# EAGLE board Final_PCB (EAGLE 9.7.0)
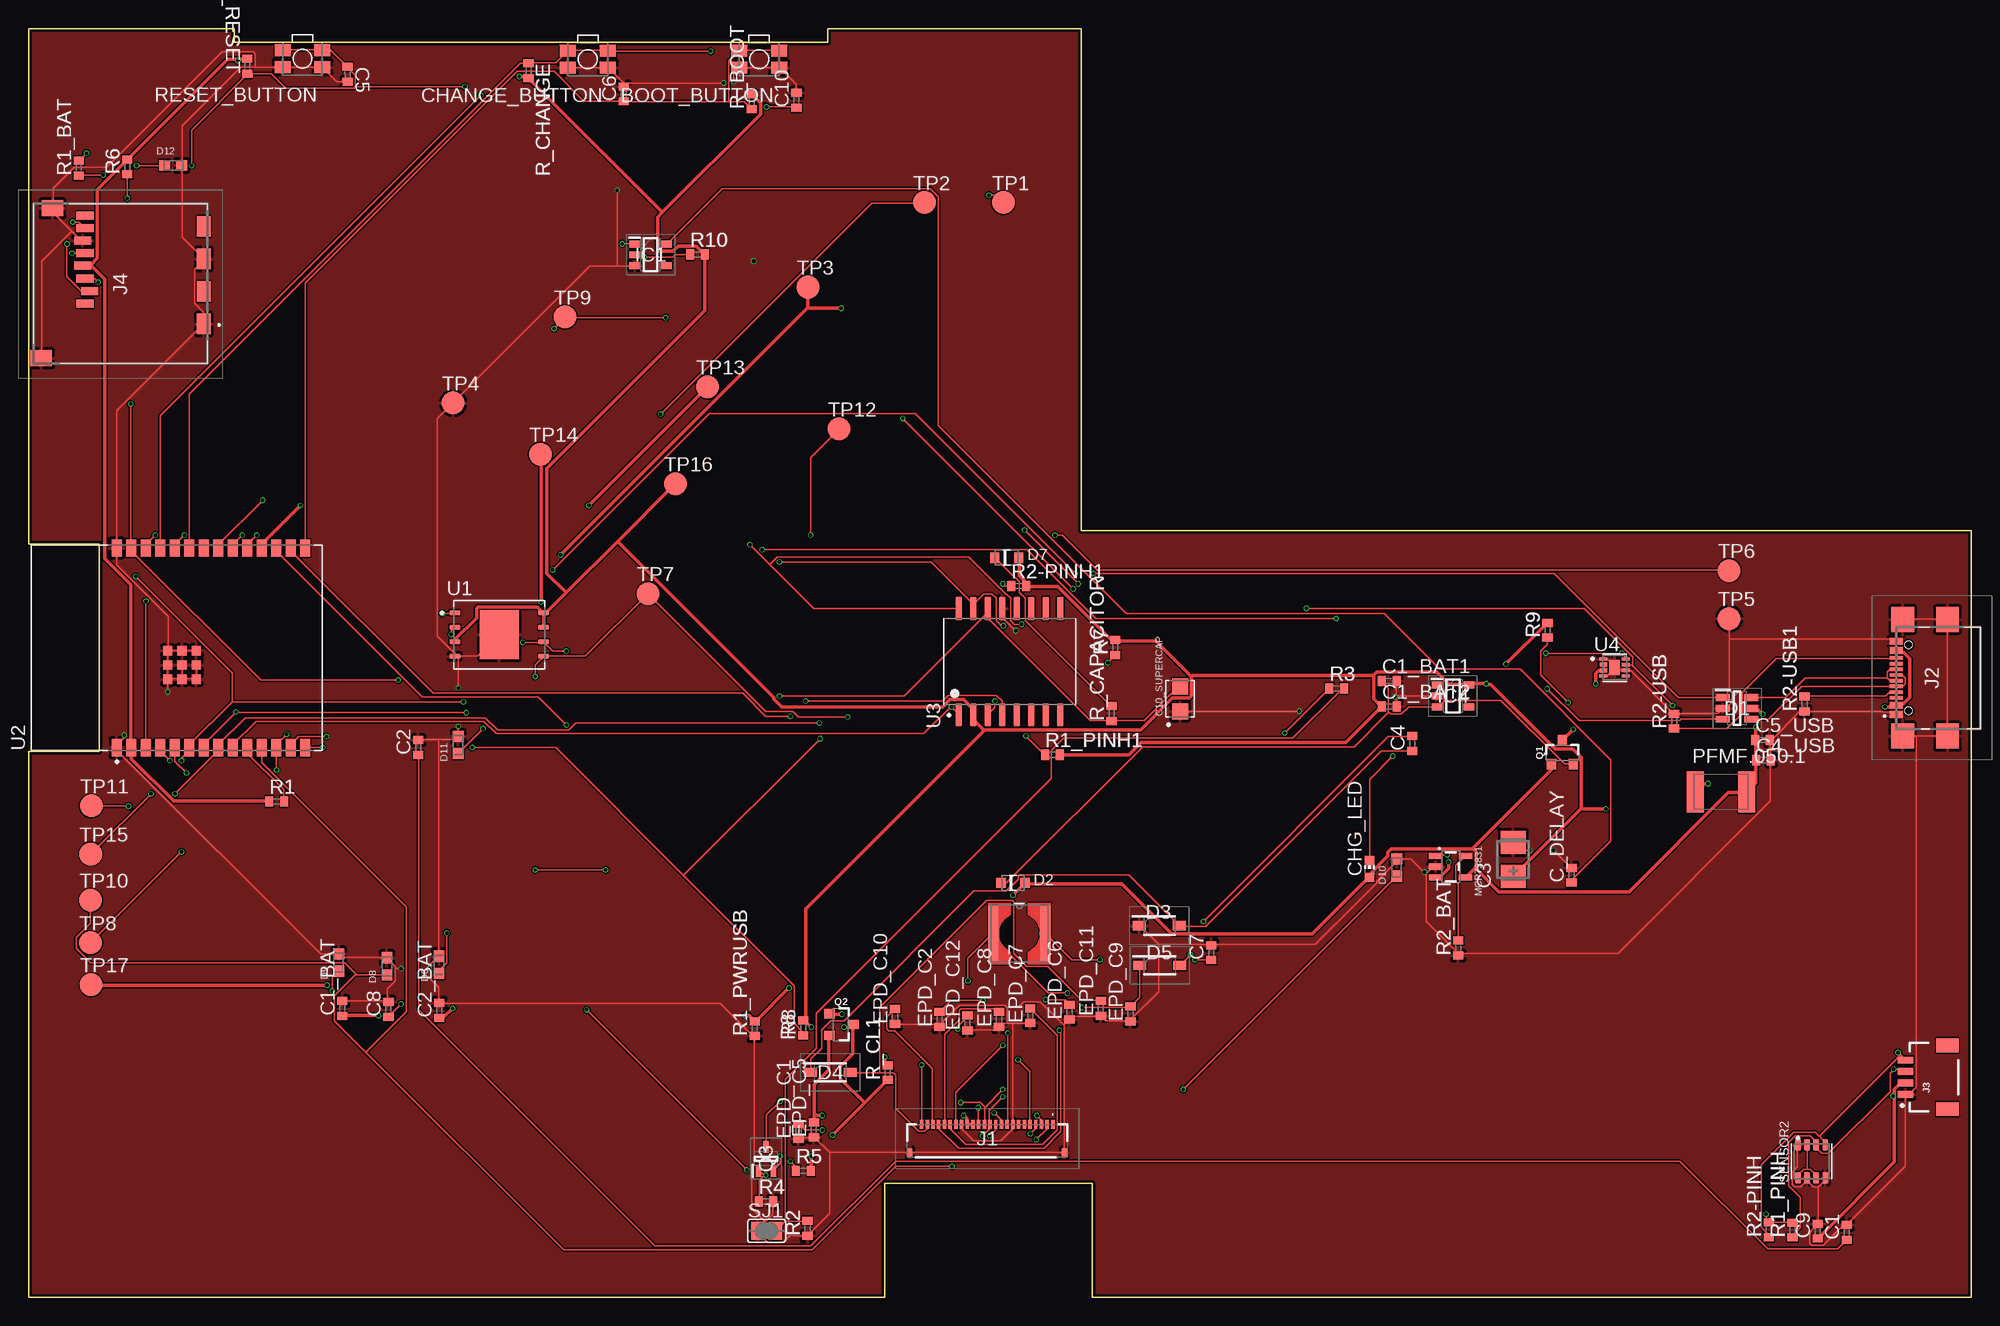
[diagram p0: board, top side]
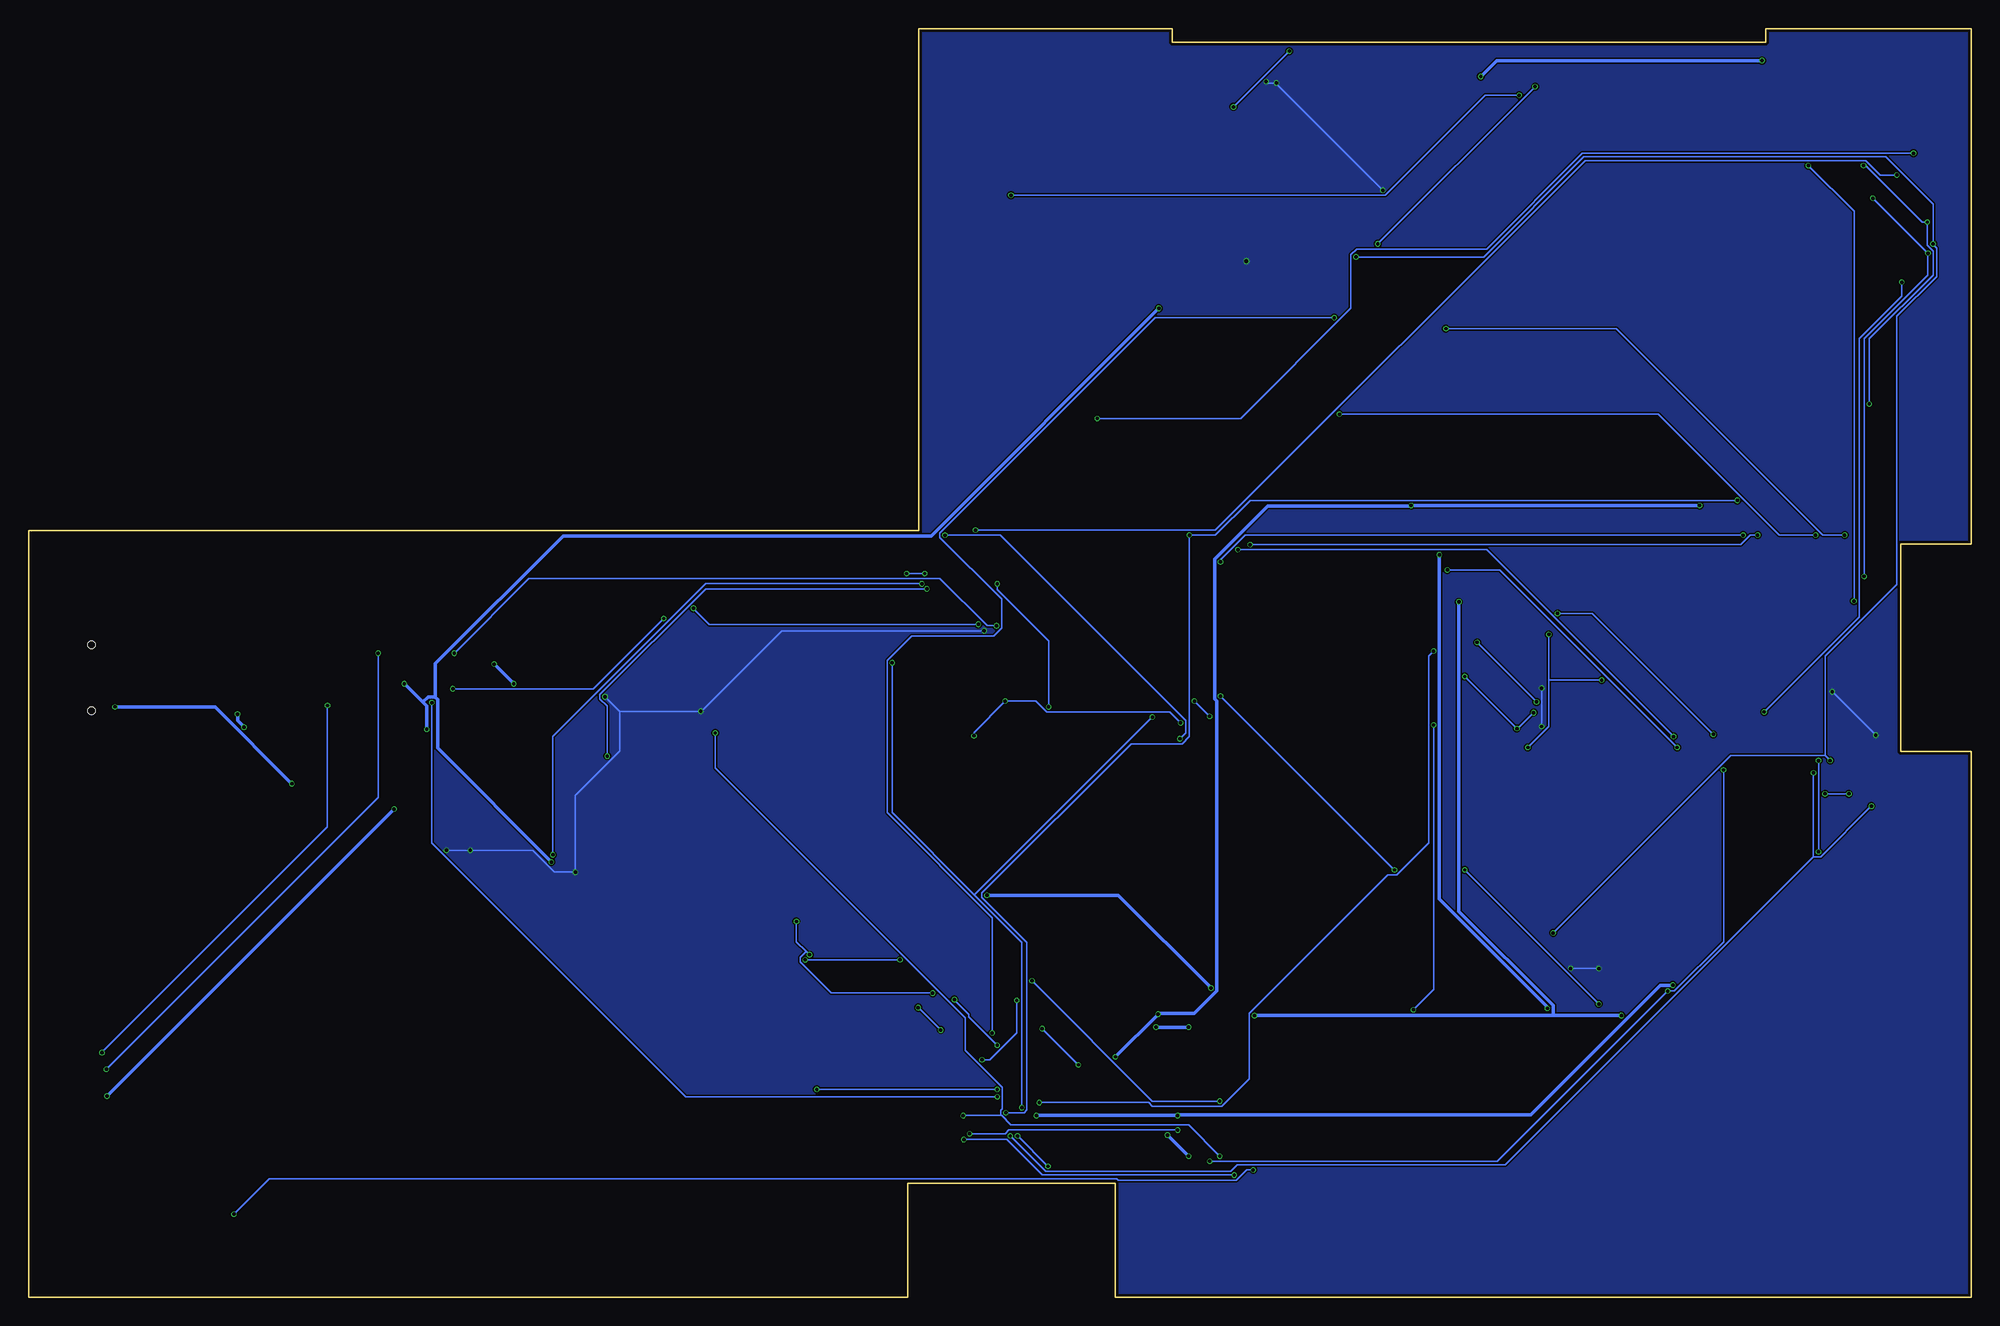
[diagram p1: board, bottom side, seen from below]

Size 170.2 x 111.2 mm. Coordinates in mm from the lower left corner, seen from the top.
Outline: 0,111.2 0,66.01 6.18,66.01 6.18,47.87 0,47.87 0,0 75,0 75,10 93.2,10 93.2,0 170.2,0 170.2,67.2 92.2,67.2 92.2,111.2 70,111.2 70,110 18,110 18,111.2 0,111.2
Copper layers (1*16): Top 0.035mm / dielectric 1.6mm / Bottom 0.035mm
Design rules "jlcpcb-2layers.dru": minimum track width 5mil, minimum drill 0.3mm, track to track 5mil, track to pad 5mil, pad to pad 5mil, via to via 5mil, smd to smd 5mil, copper to edge 0.2mm, drill to drill 6mil, minimum pad ring 10mil, minimum via ring 3mil, stop-mask expansion 4mil, vias tented up to drill 0mil, thermal gap 10mil
Net classes: 1 Power: width 0.3 mm; 2 Rest: width 0.15 mm

## Footprints (pad centres in the part's own frame; a part is rotated, then mirrored left to right if it is on the bottom)
MYBUTTON = smd 1.4 x 1.05: 1 1.75,0.75; 2 -1.75,0.75; 3 -1.75,-0.75; 4 1.75,-0.75
ESP32_WROVER_EAGLE-LTSPICE_C0402 = smd 0.7 x 0.9: 1 -0.65,0; 2 0.65,0
RCL_CT3528 = smd 2 x 2.2: + -1.5,0; - 1.5,0
EAGLE-LTSPICE_C0402 = smd 0.7 x 0.9: 1 -0.65,0; 2 0.65,0
CAPCP3225X100N = smd 1.4 x 1.4: 1 -1.1,0; 2 1.1,0
ADAFRUIT_CHIP-LED0603 = smd 0.8 x 0.8: A 0,-0.75; C 0,0.75
SOT95P280X145-6N = smd 1.2 x 0.6: 1 -1.25,0.95; 2 -1.25,0; 3 -1.25,-0.95; 4 1.25,-0.95; 5 1.25,0; 6 1.25,0.95
ESP32_WROVER_AVX---SD0805S020S1R0_AVX_SD0805S020S1R0_0 = smd 0.8 x 0.9: 1 -1.05,0; 2 1.05,0
SOD3716X135N = smd 1.15 x 0.8: 1 -1.75,0; 2 1.75,0
DIOC1608X36N = smd 0.97 x 0.94: 1 -0.75,0; 2 0.75,0
SOT95P280X125-5N = smd 0.9 x 0.6: 1 -1.4,0.95; 2 -1.4,0; 3 -1.4,-0.95; 4 1.4,-0.95; 5 1.4,0.95
SOT95P280X120-5N = smd 0.9 x 0.6: 1 -1.4,0.95; 2 -1.4,0; 3 -1.4,-0.95; 4 1.4,-0.95; 5 1.4,0.95
FH34SRJ24S05SH99 = smd 0.3 x 0.8: 1 5.75,1.45; 2 5.25,1.45; 3 4.75,1.45; 4 4.25,1.45; 5 3.75,1.45; 6 3.25,1.45; 7 2.75,1.45; 8 2.25,1.45; 9 1.75,1.45; 10 1.25,1.45; 11 0.75,1.45; 12 0.25,1.45; 13 -0.25,1.45; 14 -0.75,1.45; 15 -1.25,1.45; 16 -1.75,1.45; 17 -2.25,1.45; 18 -2.75,1.45; 19 -3.25,1.45; 20 -3.75,1.45; 21 -4.25,1.45; 22 -4.75,1.45; 23 -5.25,1.45; 24 -5.75,1.45 | smd 0.4 x 0.8: MP1 6.75,-1.05; MP2 -6.75,-1.05
SAMACSYS_PARTS_USB4110GFA = smd 0.3 x 1.15: A1 -3.35,3.678; A4 -2.55,3.678; A5 -1.25,3.678; A6 -0.25,3.678; A7 0.25,3.678; A8 1.25,3.678; A9 2.55,3.678; A12 3.35,3.678; B1 3.05,3.678; B4 2.25,3.678; B5 1.75,3.678; B6 0.75,3.678; B7 -0.75,3.678; B8 -1.75,3.678; B9 -2.25,3.678; B12 -3.05,3.678 | smd 2.18 x 2: MP1 -5.11,-0.827; MP2 5.11,-0.827; MP3 -5.11,3.103; MP4 5.11,3.103 | hole 0.65: -2.89,2.603; 2.89,2.603
JST04_1MM_RA = smd 0.6 x 1.35: 1 -1.5,0; 2 -0.5,0; 3 0.5,0; 4 1.5,0 | smd 1.2 x 2: NC1 2.8,-3.675; NC2 -2.8,-3.675
112ATAARR03ATTEND = smd 1.8 x 1.2: G1 10.6,10.4; G2 4.9,10.4; S1 7.75,10.4; S2 2.05,10.4 | smd 1.4 x 1.9: G3 13.6,-3.85; G4 0.45,-2.85 | smd 0.7 x 1.5: P1 8.8,0; P2 7.7,0.4; P3 6.6,0; P4 5.5,-0.2; P5 4.4,0; P6 3.3,-0.2; P7 2.2,0; P8 1.1,0
IND_4828-WE-TPC_WRE = smd 0.889 x 4.826: 1 -2.286,0; 2 2.286,0
ESP32_WROVER_SPARKFUN-IC-POWER_SOT23-5 = smd 0.55 x 1.2: 1 -0.95,-1.3; 2 0,-1.3; 3 0.95,-1.3; 4 0.95,1.3; 5 -0.95,1.3
ESP32C6_VARISTOR_CT/CN1812 = smd 1.5 x 3.6: 1 -2.25,0; 2 2.25,0
ESP32_WROVER_SPARKFUN-DISCRETESEMI_SOT23-3 = smd 0.8 x 0.9: 1 -0.95,-1; 2 0.95,-1; 3 0,1.1
SOT65P210X110-3N = smd 1.05 x 0.5: 1 -1.05,0.65; 2 -1.05,-0.65; 3 1.05,0
ESP32_WROVER_EAGLE-LTSPICE_R0402 = smd 0.7 x 0.9: 1 -0.65,0; 2 0.65,0
ESP32_WROVER_BME680_PSON80P300X300X100-8N = smd 1.016 x 0.5: 1 1.458,1.2; 2 1.458,0.4; 3 1.458,-0.4; 4 1.458,-1.2; 5 -1.458,-1.22; 6 -1.458,-0.4; 7 -1.458,0.4; 8 -1.458,1.2
SJ = smd 1.168 x 1.6: 1 -0.762,0; 2 0.762,0
TP20R = smd 2 x 2: TP 0,0
SON127P600X800X80-9N = smd 0.94 x 0.44: 1 -3.895,1.905; 2 -3.895,0.635; 3 -3.895,-0.635; 4 -3.895,-1.905; 5 3.895,-1.905; 6 3.895,-0.635; 7 3.895,0.635; 8 3.895,1.905 | smd 3.4 x 4.3: 9 0,0
XCVR_ESP32-C6-WROOM-1-N8 = smd 1.5 x 0.9: 1 -8.75,5.26; 2 -8.75,3.99; 3 -8.75,2.72; 4 -8.75,1.45; 5 -8.75,0.18; 6 -8.75,-1.09; 7 -8.75,-2.36; 8 -8.75,-3.63; 9 -8.75,-4.9; 10 -8.75,-6.17; 11 -8.75,-7.44; 12 -8.75,-8.71; 13 -8.75,-9.98; 14 -8.75,-11.25; 15 8.75,-11.25; 16 8.75,-9.98; 17 8.75,-8.71; 18 8.75,-7.44; 19 8.75,-6.17; 20 8.75,-4.9; 21 8.75,-3.63; 22 8.75,-2.36; 23 8.75,-1.09; 24 8.75,0.18; 25 8.75,1.45; 26 8.75,2.72; 27 8.75,3.99; 28 8.75,5.26 | smd 0.8 x 0.8: 29_1 -2.755,0.79; 29_2 -1.505,0.79; 29_3 -0.255,0.79; 29_4 -2.755,-0.46; 29_5 -1.505,-0.46; 29_6 -0.255,-0.46; 29_7 -2.755,-1.71; 29_8 -1.505,-1.71; 29_9 -0.255,-1.71
SOIC127P1032X265-16N = smd 2.05 x 0.59: 1 -4.655,4.445; 2 -4.655,3.175; 3 -4.655,1.905; 4 -4.655,0.635; 5 -4.655,-0.635; 6 -4.655,-1.905; 7 -4.655,-3.175; 8 -4.655,-4.445; 9 4.655,-4.445; 10 4.655,-3.175; 11 4.655,-1.905; 12 4.655,-0.635; 13 4.655,0.635; 14 4.655,1.905; 15 4.655,3.175; 16 4.655,4.445
SON50P200X200X80-9N = smd 0.76 x 0.27: 1 -0.985,0.75; 4 -0.985,-0.75; 5 0.985,-0.75; 6 0.985,-0.25; 7 0.985,0.25; 8 0.985,0.75 | smd 0.762 x 0.356: 2 -0.985,0.25; 3 -0.985,-0.25 | smd 0.9 x 1.3: 9 0,0

## Placement (x,y rotation side)
BOOT_BUTTON  BUTTON_CUSYOMV1  [MYBUTTON]  64,108.52 180 top
C1  100nF  [ESP32_WROVER_EAGLE-LTSPICE_C0402]  159.27,5.71 90 top
C1_BAT  4.7uF  [ESP32_WROVER_EAGLE-LTSPICE_C0402]  27.48,25.34 90 top
C1_BAT1  4.7uF  [ESP32_WROVER_EAGLE-LTSPICE_C0402]  119.19,54.03 0 top
C1_BAT2  4.7uF  [ESP32_WROVER_EAGLE-LTSPICE_C0402]  119.2,51.79 0 top
C2  100nF  [ESP32_WROVER_EAGLE-LTSPICE_C0402]  34.13,48.2 90 top
C2_BAT  4.7uF  [ESP32_WROVER_EAGLE-LTSPICE_C0402]  35.98,25.17 90 top
C3  100uF  [RCL_CT3528]  130.05,38.39 90 top
C4  4.7uF/25V  [ESP32_WROVER_EAGLE-LTSPICE_C0402]  121.22,48.54 90 top
C4_USB  100nF  [ESP32_WROVER_EAGLE-LTSPICE_C0402]  151.98,47.08 0 top
C5  1nF  [EAGLE-LTSPICE_C0402]  27.95,107.19 270.6 top
C5_USB  4.7uF  [ESP32_WROVER_EAGLE-LTSPICE_C0402]  151.89,48.86 0 top
C6  100nF  [EAGLE-LTSPICE_C0402]  52.15,105.46 90 top
C7  10uF  [ESP32_WROVER_EAGLE-LTSPICE_C0402]  103.61,30.22 90 top
C8  100nF  [ESP32_WROVER_EAGLE-LTSPICE_C0402]  31.52,25.26 90 top
C9  100nF  [ESP32_WROVER_EAGLE-LTSPICE_C0402]  156.73,5.83 90 top
C10  100nF  [EAGLE-LTSPICE_C0402]  67.26,104.92 90 top
C10_SUPERCAP  CPH3225A  [CAPCP3225X100N]  100.87,52.45 90 top
C_DELAY  100nF  [ESP32_WROVER_EAGLE-LTSPICE_C0402]  135.16,37 90 top
CHANGE_BUTTON  BUTTON_CUSYOMV1  [MYBUTTON]  49,108.52 180 top
CHG_LED  [ADAFRUIT_CHIP-LED0603]  117.47,37.55 0 top
D1  USBLC6-2SC6Y  [SOT95P280X145-6N]  149.67,51.63 0 top
D2  ESP32_WROVER_AVX---SD0805S020S1R0_AVX_SD0805S020S1R0_0_0AVX_SD0805S020S1R0_0_0  [ESP32_WROVER_AVX---SD0805S020S1R0_AVX_SD0805S020S1R0_0]  86.24,36.32 0 top
D3  MBR0530  [SOD3716X135N]  99.06,32.58 0 top
D4  MBR0530  [SOD3716X135N]  70.24,19.72 0 top
D5  MBR0530  [SOD3716X135N]  99.1,29.1 0 top
D6  PGB1010603MR  [DIOC1608X36N]  35.96,29.16 90 top
D7  ESP32_WROVER_AVX---SD0805S020S1R0_AVX_SD0805S020S1R0_0_0AVX_SD0805S020S1R0_0_0  [ESP32_WROVER_AVX---SD0805S020S1R0_AVX_SD0805S020S1R0_0]  85.7,64.83 0 top
D8  PGB1010603MR  [DIOC1608X36N]  31.4,29.03 90 top
D9  PGB1010603MR  [DIOC1608X36N]  27.17,29.34 90 top
D10  PGB1010603MR  [DIOC1608X36N]  119.85,37.67 90 top
D11  PGB1010603MR  [DIOC1608X36N]  37.64,48.43 90 top
D12  PGB1010603MR  [DIOC1608X36N]  12.66,99.21 0 top
EPD_C1  1uF/50V  [EAGLE-LTSPICE_C0402]  67.45,14.56 90 top
EPD_C2  1uF/50V  [EAGLE-LTSPICE_C0402]  79.81,24.36 90 top
EPD_C5  0.1uF/50V  [EAGLE-LTSPICE_C0402]  68.8,14.69 90 top
EPD_C6  1uF/50V  [EAGLE-LTSPICE_C0402]  91.19,25.01 90 top
EPD_C7  1uF/50V  [EAGLE-LTSPICE_C0402]  87.75,24.7 90 top
EPD_C8  1uF/50V  [EAGLE-LTSPICE_C0402]  85.02,24.36 90 top
EPD_C9  1uF/50V  [EAGLE-LTSPICE_C0402]  96.53,24.85 90 top
EPD_C10  1uF/50V  [EAGLE-LTSPICE_C0402]  75.9,24.62 90 top
EPD_C11  1uF/50V  [EAGLE-LTSPICE_C0402]  93.94,25.33 90 top
EPD_C12  1uF/50V  [EAGLE-LTSPICE_C0402]  82.24,24.06 90 top
IC1  BD5229G-TR  [SOT95P280X125-5N]  54.49,91.37 0 top
IC4  XC6220A331MR-G  [SOT95P280X120-5N]  124.78,52.71 0 top
J1  FH34SRJ-24S-0.5SH_99_  [FH34SRJ24S05SH99]  83.98,13.71 0 top
J2  SAMACSYS_PARTS_USB4110-GF-A  [SAMACSYS_PARTS_USB4110GFA]  167.28,54.3 90 top
J3  QWIIC_RIGHT_ANGLE  [JST04_1MM_RA]  164.43,19.3 90 top
J4  112A-TAAR-R03_ATTEND  [112ATAARR03ATTEND]  4.95,95.9 270 top
L1  68uH  [IND_4828-WE-TPC_WRE]  86.8,31.89 0 top
MCP73831  ESP32_WROVER_SPARKFUN-IC-POWER_MCP73831  [ESP32_WROVER_SPARKFUN-IC-POWER_SOT23-5]  124.58,37.75 270 top
PFMF.050.1  ESP32C6_VARISTORCN1812  [ESP32C6_VARISTOR_CT/CN1812]  148.25,44.3 0 top
Q1  20V/4.2A/52mΩ/1.4W  [ESP32_WROVER_SPARKFUN-DISCRETESEMI_SOT23-3]  134.36,47.73 0 top
Q2  20V/4.2A/52mΩ/1.4W  [ESP32_WROVER_SPARKFUN-DISCRETESEMI_SOT23-3]  71.16,23.93 270 top
Q3  SI1308EDL-T1-GE3  [SOT65P210X110-3N]  64.6,12.16 90 top
R1  10K  [ESP32_WROVER_EAGLE-LTSPICE_R0402]  21.74,43.47 0 top
R1_BAT  200  [ESP32_WROVER_EAGLE-LTSPICE_R0402]  4.4,98.97 90 top
R1_PINH  10k  [ESP32_WROVER_EAGLE-LTSPICE_R0402]  154.52,5.91 90 top
R1_PINH1  10K  [ESP32_WROVER_EAGLE-LTSPICE_R0402]  89.69,47.56 0 top
R1_PWRUSB  100K  [ESP32_WROVER_EAGLE-LTSPICE_R0402]  63.62,23.57 90 top
R2  2.2  [ESP32_WROVER_EAGLE-LTSPICE_R0402]  68.24,6.05 90 top
R2-PINH  10k  [ESP32_WROVER_EAGLE-LTSPICE_R0402]  152.44,5.94 90 top
R2-PINH1  10K  [ESP32_WROVER_EAGLE-LTSPICE_R0402]  86.74,62.35 0 top
R2-USB  5k1  [ESP32_WROVER_EAGLE-LTSPICE_R0402]  144.15,50.49 90 top
R2-USB1  5k1  [ESP32_WROVER_EAGLE-LTSPICE_R0402]  155.57,52.01 90 top
R2_BAT  2K  [ESP32_WROVER_EAGLE-LTSPICE_R0402]  125.25,30.62 90 top
R3  0.47  [ESP32_WROVER_EAGLE-LTSPICE_R0402]  114.6,53.37 0 top
R4  10K  [ESP32_WROVER_EAGLE-LTSPICE_R0402]  64.6,8.4 0 top
R5  10K  [ESP32_WROVER_EAGLE-LTSPICE_R0402]  67.88,11.09 0 top
R6  10K  [ESP32_WROVER_EAGLE-LTSPICE_R0402]  8.65,99.08 90 top
R7  10K  [ESP32_WROVER_EAGLE-LTSPICE_R0402]  95.2,56.97 90 top
R8  10K  [ESP32_WROVER_EAGLE-LTSPICE_R0402]  67.86,23.64 90 top
R9  10K  [ESP32_WROVER_EAGLE-LTSPICE_R0402]  133.07,58.47 90 top
R10  10K  [ESP32_WROVER_EAGLE-LTSPICE_R0402]  58.6,91.4 0 top
R_BOOT  10K  [ESP32_WROVER_EAGLE-LTSPICE_R0402]  63.35,104.78 90 top
R_CAPACITOR  15  [ESP32_WROVER_EAGLE-LTSPICE_R0402]  94.88,51.18 90 top
R_CHANGE  10K  [ESP32_WROVER_EAGLE-LTSPICE_R0402]  43.8,107.5 270 top
R_CL1  10K  [ESP32_WROVER_EAGLE-LTSPICE_R0402]  75.26,19.71 90 top
R_RESET  10K  [ESP32_WROVER_EAGLE-LTSPICE_R0402]  19.16,107.9 90.4 top
RESET_BUTTON  BUTTON_CUSYOMV1  [MYBUTTON]  24,108.57 180 top
SENSOR2  ESP32_WROVER_BME680_BME680  [ESP32_WROVER_BME680_PSON80P300X300X100-8N]  156.19,11.93 90 top
SJ1  [SJ]  64.66,5.83 0 top
TP1  TPTP20R  [TP20R]  85.39,95.94 0 top
TP2  TPTP20R  [TP20R]  78.47,95.94 0 top
TP3  TPTP20R  [TP20R]  68.28,88.54 0 top
TP4  TPTP20R  [TP20R]  37.2,78.38 0 top
TP5  TPTP20R  [TP20R]  148.97,59.49 0 top
TP6  TPTP20R  [TP20R]  148.97,63.7 0 top
TP7  TPTP20R  [TP20R]  54.27,61.68 0 top
TP8  TPTP20R  [TP20R]  5.44,31.08 0 top
TP9  TPTP20R  [TP20R]  47.01,85.91 0 top
TP10  TPTP20R  [TP20R]  5.44,34.81 0 top
TP11  TPTP20R  [TP20R]  5.5,43.08 0 top
TP12  TPTP20R  [TP20R]  71,76.11 0 top
TP13  TPTP20R  [TP20R]  59.49,79.8 0 top
TP14  TPTP20R  [TP20R]  44.84,73.89 0 top
TP15  TPTP20R  [TP20R]  5.45,38.85 0 top
TP16  TPTP20R  [TP20R]  56.66,71.31 0 top
TP17  TPTP20R  [TP20R]  5.49,27.41 0 top
U1  W25Q512JVEIQ  [SON127P600X800X80-9N]  41.23,58.09 0 top
U2  ESP32-C6-WROOM-1-N8  [XCVR_ESP32-C6-WROOM-1-N8]  12.99,56.93 90 top
U3  DS3231SN#  [SOIC127P1032X265-16N]  85.95,55.73 90 top
U4  MAX17048G+T10  [SON50P200X200X80-9N]  138.94,55.2 0 top

## Library data of the parts
BOOT_BUTTON CHANGE_BUTTON CHG_LED PFMF.050.1 RESET_BUTTON SJ1 TP1-TP17 = DeskAssistant v19 v1
C1 C1_BAT C1_BAT1 C1_BAT2 C2 C2_BAT C4 C4_USB C5 C5_USB C6-C10 C_DELAY EPD_C1 EPD_C2 EPD_C5-EPD_C12 = DeskAssistant v19 v1; SPICEMODEL: NONE; SPICEPREFIX: C
C3 = DeskAssistant v19 v1; SPICEPREFIX: C
C10_SUPERCAP = DeskAssistant v19 v1; AVAILABILITY: Not in stock; CHECK_PRICES: https://www.snapeda.com/parts/CPH3225A/Seiko+Instruments/view-part/?ref=eda; DESCRIPTION: 11 mF (EDLC) Supercapacitor 3.3 V 1210 (3225 Metric) - -; MF: Seiko Instruments; MP: CPH3225A; PACKAGE: 1210 Seiko; PRICE: None; PURCHASE-URL: https://www.snapeda.com/api/url_track_click_mouser/?unipart_id=562593&manufacturer=Seiko Instruments&part_name=CPH3225A&search_term=None; SNAPEDA_LINK: https://www.snapeda.com/parts/CPH3225A/Seiko+Instruments/view-part/?ref=snap
D1 = DeskAssistant v19 v1; AVAILABILITY: In Stock; CHECK_PRICES: https://www.snapeda.com/parts/USBLC6-2SC6Y/STMicroelectronics/view-part/?ref=eda; DESCRIPTION: 17V Clamp 5A (8/20µs) Ipp Tvs Diode Surface Mount SOT-23-6; MF: STMicroelectronics; MP: USBLC6-2SC6Y; PACKAGE: SOT-23-6 STMicroelectronics; PRICE: None; SNAPEDA_LINK: https://www.snapeda.com/parts/USBLC6-2SC6Y/STMicroelectronics/view-part/?ref=snap
D2 D7 = DeskAssistant v19 v1; CENTROID_NOT_SPECIFIED: No; DATASHEET: http://datasheets.avx.com/schottky.pdf; DIGIKEY_DESCRIPTION: DIODE SCHOTTKY 20V 1A 0805; DIGIKEY_PART_NUMBER: 478-7800-1-ND; LEAD_FREE: yes; MF: AVX; MOUSER_PART_NUMBER: 581-SD0805S020S1R0; PACKAGE: 0805 (2012 metric); PREFIX: D; ROHS: yes; TEMPERATURE_RANGE_HIGH: +125°C; TEMPERATURE_RANGE_LOW: -55°C
D3-D5 = DeskAssistant v19 v1; AVAILABILITY: In Stock; CHECK_PRICES: https://www.snapeda.com/parts/MBR0530/Onsemi/view-part/?ref=eda; DESCRIPTION: Diode Schottky 30 V 500mA Surface Mount SOD-123; MF: ON Semiconductor; MP: MBR0530; PACKAGE: SOD-123-2 ON Semiconductor; PRICE: None; PURCHASE-URL: https://www.snapeda.com/api/url_track_click_mouser/?unipart_id=179458&manufacturer=ON Semiconductor&part_name=MBR0530&search_term=None; SNAPEDA_LINK: https://www.snapeda.com/parts/MBR0530/Onsemi/view-part/?ref=snap
D6 D8-D12 = DeskAssistant v19 v1; AVAILABILITY: In Stock; CHECK_PRICES: https://www.snapeda.com/parts/PGB1010603MR/Littelfuse/view-part/?ref=eda; DESCRIPTION: 150V (Typ) Clamp - Ipp Tvs Diode Surface Mount 0603 (1608 Metric); MF: Littelfuse Inc.; MP: PGB1010603MR; PACKAGE: 0603 Littelfuse Inc.; PRICE: None; PURCHASE-URL: https://www.snapeda.com/api/url_track_click_mouser/?unipart_id=5659453&manufacturer=Littelfuse Inc.&part_name=PGB1010603MR&search_term=None; SNAPEDA_LINK: https://www.snapeda.com/parts/PGB1010603MR/Littelfuse/view-part/?ref=snap
IC1 = DeskAssistant v19 v1; DESCRIPTION: Voltage Detector with Adjustable Delay Time: CMOS processes are utilized to develop high precision, low current consumption CMOS reset ICs that allow arbitrary setting of the delay time. The extensive lineup includes both Nch Open Drain and CMOS output types in a wide range of detection voltages (from 2.3V to 6.0V, in 0.1V steps), enabling selection of the ideal solution based on customer requirements. In addition, the entire series is of course both lead-free and RoHS-compliant.; HEIGHT: 1.25mm; MANUFACTURER_NAME: ROHM Semiconductor; MANUFACTURER_PART_NUMBER: BD5229G-TR; MOUSER_PART_NUMBER: 755-BD5229G-TR; MOUSER_PRICE-STOCK: https://www.mouser.co.uk/ProductDetail/ROHM-Semiconductor/BD5229G-TR?qs=4kLU8WoGk0vvnhrrYwdszw%3D%3D
IC4 = DeskAssistant v19 v1; DESCRIPTION: LDO Voltage Regulators; HEIGHT: 1.2mm; MANUFACTURER_NAME: Torex; MANUFACTURER_PART_NUMBER: XC6220A331MR-G; MOUSER_PART_NUMBER: 865-XC6220A331MR-G; MOUSER_PRICE-STOCK: https://www.mouser.co.uk/ProductDetail/Torex-Semiconductor/XC6220A331MR-G?qs=AsjdqWjXhJ8ZSWznL1J0gg%3D%3D
J1 = DeskAssistant v19 v1; DESCRIPTION: 24 Position FFC, FPC Connector Contacts, Top and Bottom 0.020" (0.50mm) Surface Mount, Right Angle; HEIGHT: 1.1mm; MANUFACTURER_NAME: Hirose; MANUFACTURER_PART_NUMBER: FH34SRJ-24S-0.5SH(99); MOUSER_PART_NUMBER: 798-FH34SRJ24S05SH99; MOUSER_PRICE-STOCK: https://www.mouser.co.uk/ProductDetail/Hirose-Connector/FH34SRJ-24S-0.5SH99?qs=vcbW%252B4%252BSTIpKBl5ap9J8Fw%3D%3D
J2 = DeskAssistant v19 v1; DESCRIPTION: CONN USB 2.0 TYPE-C R/A SMT; HEIGHT: 3.26mm; MANUFACTURER_NAME: GCT (GLOBAL CONNECTOR TECHNOLOGY); MANUFACTURER_PART_NUMBER: USB4110-GF-A; MOUSER_PART_NUMBER: 640-USB4110-GF-A; MOUSER_PRICE-STOCK: https://www.mouser.co.uk/ProductDetail/GCT/USB4110-GF-A?qs=KUoIvG%2F9IlYiZvIXQjyJeA%3D%3D
J3 = DeskAssistant v19 v1; PROD_ID: CONN-13694
J4 = DeskAssistant v19 v1; DESCRIPTION: Micro SD Card Socket, Push-Push Type, Top Mount, SMT, H=1.83mm, 10u; HEIGHT: 1.9mm; MANUFACTURER_NAME: ATTEND; MANUFACTURER_PART_NUMBER: 112A-TAAR-R03 ATTEND
L1 = DeskAssistant v19 v1; COPYRIGHT: Copyright (C) 2024 Ultra Librarian. All rights reserved.; MANUFACTURER_PART_NUMBER: 744043680; MFR_NAME: Wurth Electronics
MCP73831 = DeskAssistant v19 v1; PROD_ID: IC-09995
Q1 Q2 = DeskAssistant v19 v1; PROD_ID: TRAN-14388
Q3 = DeskAssistant v19 v1; AVAILABILITY: In Stock; CHECK_PRICES: https://www.snapeda.com/parts/SI1308EDL-T1-GE3/Vishay+Siliconix/view-part/?ref=eda; DESCRIPTION: Si1308EDL-T1-GE3 N-channel MOSFET Transistor, 1.5 A, 30 V, 3-Pin SC-70 | Siliconix / Vishay SI1308EDL-T1-GE3; MF: Vishay Siliconix; MP: SI1308EDL-T1-GE3; PACKAGE: SOT-323 Vishay Semiconductor; PRICE: None; PURCHASE-URL: https://www.snapeda.com/api/url_track_click_mouser/?unipart_id=274603&manufacturer=Vishay Siliconix&part_name=SI1308EDL-T1-GE3&search_term=None; SNAPEDA_LINK: https://www.snapeda.com/parts/SI1308EDL-T1-GE3/Vishay+Siliconix/view-part/?ref=snap
R1 R1_BAT R1_PINH R1_PINH1 R1_PWRUSB R2 R2-PINH R2-PINH1 R2-USB R2-USB1 R2_BAT R3-R10 R_BOOT R_CAPACITOR R_CHANGE R_CL1 R_RESET = DeskAssistant v19 v1; SPICEMODEL: NONE; SPICEPREFIX: R
SENSOR2 = DeskAssistant v19 v1; AVAILABILITY: Unavailable; DESCRIPTION: Integrated Environmental Unit; MF: Bosch Sensortec; MP: BME680; PACKAGE: LGA-8 Bosch Tools; PRICE: None
U1 = DeskAssistant v19 v1; AVAILABILITY: In Stock; CHECK_PRICES: https://www.snapeda.com/parts/W25Q512JVEIQ/Winbond+Electronics/view-part/?ref=eda; DESCRIPTION: FLASH - NOR Memory IC 512Mb (64M x 8) SPI - Quad I/O 133 MHz 8-WSON (8x6); MF: Winbond Electronics; MP: W25Q512JVEIQ; PACKAGE: Package; PRICE: None; SNAPEDA_LINK: https://www.snapeda.com/parts/W25Q512JVEIQ/Winbond+Electronics/view-part/?ref=snap
U2 = DeskAssistant v19 v1; AVAILABILITY: In Stock; CHECK_PRICES: https://www.snapeda.com/parts/ESP32-C6-WROOM-1-N8/Espressif+Systems/view-part/?ref=eda; DESCRIPTION: Multiprotocol Modules ESP32-C6 module, Wi-Fi 6 in 2.4 GHz band, Bluetooth 5, Zigbee 3.0 and Thread. ESP34-WROOM Compatible - ENGINEERING SAMPLE; MF: Espressif Systems; MP: ESP32-C6-WROOM-1-N8; PACKAGE: None; PRICE: None; SNAPEDA_LINK: https://www.snapeda.com/parts/ESP32-C6-WROOM-1-N8/Espressif+Systems/view-part/?ref=snap
U3 = DeskAssistant v19 v1; AVAILABILITY: In Stock; CHECK_PRICES: https://www.snapeda.com/parts/DS3231SN%23/Analog+Devices/view-part/?ref=eda; DESCRIPTION: Extremely Accurate I²C-Integrated RTC/TCXO/Crystal; MF: Analog Devices; MP: DS3231SN#; PACKAGE: SOIC-16 Maxim; PRICE: None; PURCHASE-URL: https://www.snapeda.com/api/url_track_click_mouser/?unipart_id=99048&manufacturer=Analog Devices&part_name=DS3231SN#&search_term=None; SNAPEDA_LINK: https://www.snapeda.com/parts/DS3231SN%23/Analog+Devices/view-part/?ref=snap
U4 = DeskAssistant v19 v1; AVAILABILITY: In Stock; CHECK_PRICES: https://www.snapeda.com/parts/MAX17048G+T10/Analog+Devices/view-part/?ref=eda; DESCRIPTION: 3µA 1-Cell/2-Cell Fuel Gauge with ModelGauge; MF: Analog Devices; MP: MAX17048G+T10; PACKAGE: TDFN-8 Maxim; PRICE: None; PURCHASE-URL: https://www.snapeda.com/api/url_track_click_mouser/?unipart_id=329239&manufacturer=Analog Devices&part_name=MAX17048G+T10&search_term=None; SNAPEDA_LINK: https://www.snapeda.com/parts/MAX17048G+T10/Analog+Devices/view-part/?ref=snap

## Nets
3V3 [Power]: C1_BAT2.1 C3.+ C9.1 D7.2 IC4.5 J3.2 J4.P4 Q2.3 R1.1 R1_PINH1.2 R2-PINH1.2 R5.2 R6.2 R7.2 R8.2 R9.2 R10.2 R_BOOT.2 R_CHANGE.2 R_CL1.1 R_RESET.2 TP16.TP U1.3 U1.7 U1.8 U2.2 U3.2
32KHZ [Rest]: R2-PINH1.1 U2.9 U3.1
DN [Rest]: D1.4 J2.A7 J2.B7
DP [Rest]: D1.6 J2.A6 J2.B6
EDP_3V3 [Rest]: C7.1 L1.2
EPD_3V3 [Power]: EPD_C5.2 J1.15 J1.16 Q2.2 TP17.TP
EPD_3V3_C [Power]: Q2.1 R_CL1.2 TP13.TP U2.18
EPD_BUSY [Rest]: J1.9 TP9.TP U2.26
EPD_CS [Rest]: D8.1 J1.12 R9.1 TP10.TP U2.11
EPD_DC [Rest]: J1.11 TP11.TP U2.5
EPD_RST [Rest]: J1.10 TP12.TP U2.21
FLASH_CS [Rest]: D9.1 R5.1 U1.1 U2.12
GDR [Rest]: J1.2 Q3.1 R4.1
GND [Rest]: BOOT_BUTTON.1 BOOT_BUTTON.2 C1.2 C1_BAT1.2 C1_BAT2.2 C1_BAT.2 C2.2 C2_BAT.2 C3.- C4_USB.2 C5.2 C5_USB.2 C6.2 C7.2 C8.2 C9.2 C10.2 C10_SUPERCAP.1 C_DELAY.2 CHANGE_BUTTON.1 CHANGE_BUTTON.2 D1.2 D3.1 D6.2 D8.2 D9.2 D10.2 D11.2 D12.2 EPD_C1.1 EPD_C2.1 EPD_C5.1 EPD_C6.1 EPD_C7.1 EPD_C8.1 EPD_C9.1 EPD_C10.1 EPD_C11.1 EPD_C12.1 IC1.3 IC4.2 J1.8 J1.17 J1.MP1 J1.MP2 J2.A1 J2.A12 J2.B1 J2.B12 J2.MP1 J2.MP2 J2.MP3 J2.MP4 J3.1 J4.G1 J4.G2 J4.G3 J4.G4 J4.P6 MCP73831.2 R1_PWRUSB.1 R2-USB1.1 R2-USB.2 R2.1 R2_BAT.1 R4.2 RESET_BUTTON.1 RESET_BUTTON.2 SENSOR2.1 SENSOR2.5 SENSOR2.7 SJ1.1 TP4.TP TP5.TP U1.4 U1.9 U2.1 U2.28 U2.29_1 U2.29_2 U2.29_3 U2.29_4 U2.29_5 U2.29_6 U2.29_7 U2.29_8 U2.29_9 U3.13 U4.1 U4.4 U4.6 U4.9
GPIO8 [Rest]: R1.2 U2.10
I2C_PW [Rest]: R1_PINH.2 R2-PINH.2 U2.17
IC2_PW [Rest]: C1.1 C2.1
INT_RTC [Rest]: R1_PINH1.1 TP15.TP U2.8 U3.3
IO/BOOT [Rest]: BOOT_BUTTON.3 BOOT_BUTTON.4 C6.1 R_BOOT.1 U2.15
IO/CHANGE [Rest]: C10.1 CHANGE_BUTTON.3 CHANGE_BUTTON.4 R_CHANGE.1 U2.23
MISO [Rest]: D12.1 J4.P7 R8.1 TP6.TP U1.2 U2.27
MOSI [Rest]: D11.1 J1.14 J4.P3 R7.1 TP7.TP U1.5 U2.7
N$1 [Rest]: EPD_C10.2 J1.22
N$2 [Rest]: C1_BAT1.1 D2.1 IC4.1 IC4.3 Q1.2
N$3 [Rest]: MCP73831.5 R2_BAT.2
N$4 [Rest]: EPD_C8.2 J1.20
N$5 [Rest]: J2.B5 R2-USB.1
N$6 [Rest]: C4.1 D3.2 D4.1
N$7 [Rest]: MCP73831.1 R1_BAT.1
N$8 [Rest]: CHG_LED.C R1_BAT.2
N$9 [Rest]: EPD_C7.2 J1.19
N$10 [Rest]: J2.A5 R2-USB1.2
N$11 [Rest]: EPD_C6.2 J1.18
N$12 [Rest]: EPD_C12.2 J1.24
N$13 [Rest]: D7.1 R_CAPACITOR.2
N$14 [Rest]: EPD_C2.2 J1.5
N$15 [Rest]: EPD_C1.2 J1.4
N$17 [Rest]: SENSOR2.2 SENSOR2.6 SENSOR2.8
N$21 [Rest]: C_DELAY.1 IC1.5
PREVGH [Rest]: D5.1 EPD_C9.2 J1.21
PREVGL [Rest]: D4.2 EPD_C11.2 J1.23
RESE [Rest]: J1.3 Q3.2 R3.1
RESE' [Rest]: R2.2 R3.2 SJ1.2
RESET [Rest]: C5.1 IC1.1 R_RESET.1 RESET_BUTTON.3 RESET_BUTTON.4 U2.3
RTC_RST [Rest]: U2.16 U3.4
RX [Rest]: TP2.TP U2.24
SCK [Rest]: D10.1 J1.13 J4.P5 R6.1 TP8.TP U1.6 U2.6
SCL [Rest]: J3.4 R2-PINH.1 SENSOR2.4 U2.20 U3.16 U4.7
SDA [Rest]: J3.3 R1_PINH.1 SENSOR2.3 U2.19 U3.15 U4.8
SRC [Rest]: C4.2 D5.2 L1.1 Q3.3
SS_SD [Rest]: D6.1 J4.P2 R10.1 U2.4
TX [Rest]: TP1.TP U2.25
USB_D+ [Rest]: D1.1 U2.14
USB_D- [Rest]: D1.3 U2.13
VBAT [Power]: C2_BAT.1 MCP73831.3 Q1.3 TP3.TP U4.2 U4.3
VBUS [Power]: C1_BAT.1 C4_USB.1 C5_USB.1 CHG_LED.A D1.5 D2.2 MCP73831.4 PFMF.050.1.2 Q1.1 R1_PWRUSB.2 TP14.TP
VRTC [Rest]: C8.1 C10_SUPERCAP.2 R_CAPACITOR.1 U3.14
VUSB [Power]: J2.A4 J2.A9 J2.B4 J2.B9 PFMF.050.1.1

## Tracks (layer width: path | path; a pad name or v marks a point on that pad's centre or on a via)
3V3  (via drill 0.3)
  Top 0.3: 163.45,17.65 163.45,18.22 164.02,18.8 164.4,18.8 J3.2 | 163.45,17.65 163.45,11.87 156.78,5.21 C9.1 | R1_PINH1.2 90.36,47.56 96.39,47.56 97.47,48.64 115.38,48.64 118.49,51.75 C1_BAT2.1 118.43,51.88 117.86,52.45 117.86,54.55 | 117.86,54.55 118.11,54.8 123.38,54.8 124.46,53.72 126.17,53.72 IC4.5 126.3,53.78 v127.7,53.78 127.83,53.72 128.08,53.72 133.73,48.07 135.25,48.07 136.02,47.31 136.02,42.86 | v129.41,55.5 133.03,59.12 R9.2 | 136.02,42.86 C3.+ | v138.18,42.8 136.14,42.8 136.02,42.86 | v163.32,17.65 163.45,17.65 | R1.1 21.08,43.5 12.7,43.5 9.02,47.18 9.02,48.13 U2.2 8.95,48.32 8.95,62.48 6.67,64.77 6.67,89.22 5.43,90.46 | 5.43,90.46 5.4,90.42 4.76,90.42 J4.P4 | 5.43,90.46 6.03,91.06 6.03,97.09 8.64,99.69 R6.2 8.76,99.82 17.46,108.52 18.35,108.52 | 18.35,108.52 19.11,108.52 R_RESET.2 | U1.3 37.4,57.47 37.4,57.72 39.24,59.56 39.24,60.39 39.37,60.52 44.58,60.52 45.09,60.01 U1.8 | U1.7 45.15,58.74 45.15,59.88 U1.8 | 47.09,61.75 45.28,59.94 U1.8 | 47.09,61.75 51.59,66.26 | 51.59,66.26 56.64,71.31 TP16.TP | 55.53,95.09 64.14,103.69 64.14,104.65 63.37,105.41 R_BOOT.2 | 55.53,95.09 55.12,94.68 55.12,91.89 55.31,91.69 56.45,91.69 56.9,92.14 58.48,92.14 59.18,91.44 R10.2 59.24,91.25 59.24,86.49 45.4,72.64 45.4,63.44 47.09,61.75 | 55.53,95.09 43.81,106.81 R_CHANGE.2 43.69,106.93 43.62,107 v42.99,107 | v68.58,12.38 68.58,11.11 R5.2 | 73.25,17.05 75.25,19.05 R_CL1.1 | 73.25,17.05 v70.42,14.22 | 73.25,17.05 71.12,19.18 71.12,20.26 72.2,21.34 72.2,23.88 Q2.3 72.07,23.69 v71.44,23.69 | v68.58,23.69 68.01,24.26 67.88,24.26 R8.2 68.07,24.38 68.07,34.04 83.63,49.59 83.69,49.72
  Top 0.3: D7.2 86.81,64.77 86.81,63.25 87.31,62.74 87.31,62.48 R2-PINH1.2 87.44,62.29 90.17,62.29 94.81,57.66 95.19,57.66 R7.2 95.31,57.53 98.74,57.53 101.85,54.42 | 83.69,49.72 82.8,50.61 82.8,51.05 U3.2 82.68,51.18 82.68,51.63 81.92,52.39 80.71,52.39 80.07,51.75 65.98,51.75 65.28,52.45 65.28,52.58 51.59,66.26 | 83.69,49.72 97.41,49.72 100.2,52.51 101.66,52.51 101.85,52.7 101.85,54.42 | v18.35,108.39 18.35,108.52 | 117.86,54.55 117.73,54.48 101.98,54.48 101.85,54.42
  Bottom 0.3: v127.7,53.78 v129.41,55.5 | v138.18,42.8 v163.32,17.65 | v70.42,14.22 v68.58,12.38 | v71.44,23.69 v68.58,23.69 | v18.35,108.39 41.59,108.39 v42.99,107
32KHZ  (via drill 0.3)
  Top 0.15: v85.34,62.55 85.53,62.36 86.04,62.36 R2-PINH1.1 | U3.1 81.47,51.12 v80.83,51.75 80.77,51.75 78.42,49.4 40.96,49.4 39.88,50.48 19.94,50.48 17.91,48.45 17.91,48.2 U2.9
  Bottom 0.15: v85.34,62.55 85.34,62.04 80.83,57.53 v80.83,51.75
DN
  Top 0.15: J2.A7 163.64,54.55 164.15,54.55 164.4,54.29 164.4,53.78 164.21,53.59 163.64,53.59 J2.B7 163.58,53.53 155.32,53.53 152.46,50.67 150.94,50.67 D1.4
DP
  Top 0.15: 162.81,54.29 163,54.1 163.58,54.1 J2.A6 | 162.81,54.29 162.81,54.8 163,54.99 163.58,54.99 J2.B6 | 162.81,54.29 155.64,54.29 153.92,52.58 150.94,52.58 D1.6
EDP_3V3  (via drill 0.3)
  Top 0.15: v102.17,29.59 103.57,29.59 C7.1 | v93.85,29.59 91.38,29.59 89.09,31.88 L1.2
  Bottom 0.15: v93.85,29.59 v102.17,29.59
EPD_3V3  (via drill 0.3)
  Top 0.3: J1.15 82.68,15.18 82.23,15.18 J1.16 82.17,15.3 82.17,15.68 v81.92,15.94 | 68.83,15.94 68.83,18.67 70.1,19.94 70.1,22.92 Q2.2 | 68.83,15.94 68.83,15.37 EPD_C5.2 | 68.83,15.94 v69.53,15.94 | v26.16,27.37 5.52,27.37 TP17.TP
  Bottom 0.3: v81.92,15.94 v69.53,15.94 69.41,16 38.61,16 27.24,27.37 v26.16,27.37
EPD_3V3_C  (via drill 0.3)
  Top 0.3: v71.25,24.83 70.17,24.83 Q2.1 | v74.99,21.08 74.99,20.64 75.25,20.38 R_CL1.2 | v23.81,69.41 20.45,66.04 20.45,65.72 U2.18 | v49.09,69.41 59.44,79.76 TP13.TP
  Bottom 0.3: v74.99,21.08 v71.25,24.83 71.12,24.89 68.07,24.89 66.1,26.86 66.1,52.26 66.29,52.45 66.29,64.71 61.66,69.34 49.21,69.34 v49.09,69.41 v23.81,69.41
EPD_BUSY  (via drill 0.3)
  Top 0.15: v85.79,23.18 85.79,15.18 J1.9 | v55.82,85.85 47.05,85.85 TP9.TP 46.99,85.85 v46.04,84.9 | v11.11,66.8 10.29,65.98 10.29,65.72 U2.26
  Bottom 0.15: v85.79,23.18 85.79,33.27 95,42.48 95,55.82 92.84,57.98 85.66,57.98 84.96,58.67 84.96,61.21 90.36,66.61 90.36,66.99 71.5,85.85 v55.82,85.85 | v11.11,66.8 13.02,66.8 31.11,84.9 v46.04,84.9
EPD_CS  (via drill 0.3)
  Top 0.15: v83.57,14.16 84.2,14.8 84.2,15.11 J1.12 84.14,15.11 84.14,16.38 v85.34,17.59 | v80.9,11.49 75.95,11.49 68.64,4.19 46.86,4.19 29.56,21.5 | 29.56,21.5 26.8,24.26 26.8,26.42 28.64,28.26 28.7,28.26 | 28.7,28.26 31.37,28.26 D8.1 | v134.87,52.13 132.46,54.55 132.46,56.64 133.03,57.21 133.03,57.78 R9.1 | 29.56,21.5 33.08,25.02 33.08,34.23 20.45,46.86 20.45,48.13 U2.11 | TP10.TP 5.4,34.8 5.4,32.77 4.19,31.56 4.19,30.61 5.46,29.34 27.69,29.34 28.7,28.32 28.7,28.26
  Bottom 0.15: v80.9,11.49 v83.57,14.16 | v134.87,52.13 134.87,39.81 112.65,17.59 v85.34,17.59
EPD_DC  (via drill 0.3)
  Top 0.15: v84.2,14.16 84.71,14.67 84.71,15.11 J1.11 | v13.84,45.97 12.83,46.99 12.83,48.13 U2.5 | v8.76,43.05 5.52,43.05 TP11.TP
  Bottom 0.15: v84.2,14.16 81.09,11.05 64.9,11.05 64.33,11.62 40.83,11.62 13.84,38.61 | v13.84,45.97 13.84,38.61 | v8.76,43.05 13.21,38.61 13.84,38.61
EPD_RST  (via drill 0.3)
  Top 0.15: v84.58,16.19 85.22,15.56 85.22,15.18 J1.10 | v68.52,66.8 68.52,73.6 70.99,76.07 TP12.TP | v20.51,69.85 16.64,65.98 16.64,65.72 U2.21
  Bottom 0.15: v84.58,16.19 83,16.19 82.74,16.45 82.74,31.11 86.68,35.05 86.68,35.43 73.6,48.51 69.15,48.51 68.52,49.15 v68.52,66.8 66.23,66.8 63.18,69.85 v20.51,69.85
FLASH_CS  (via drill 0.3)
  Top 0.15: v36.26,59.94 37.34,59.94 U1.1 | v22.61,49.34 21.72,48.45 21.72,48.2 U2.12 21.72,48.13 v21.72,46.23 | v66.74,11.94 67.18,11.49 67.18,11.11 R5.1 | v26.61,26.86 26.61,28.07 27.11,28.57 D9.1
  Bottom 0.15: v36.26,59.94 33.21,59.94 v22.61,49.34 | v66.74,11.94 41.53,11.94 v26.61,26.86 26.04,26.86 21.72,31.18 v21.72,46.23
GDR  (via drill 0.3)
  Top 0.15: v88.27,13.84 89.22,14.8 89.22,15.11 J1.2 | Q3.1 64.01,11.11 64.39,10.73 v64.58,10.73 64.39,10.67 64.01,10.29 64.01,8.45 R4.1
  Bottom 0.15: v88.27,13.84 84.52,13.84 81.41,10.73 v64.58,10.73
GND  (via drill 0.3, 0.35)
  Top 0.15: 156.78,9.65 156.78,6.48 C9.2 156.72,6.41 156.02,5.71 156.02,4.76 156.21,4.57 157.23,4.57 159,6.35 159.26,6.35 C1.2 159.32,6.41 164.4,11.49 164.4,17.78 J3.1 164.47,17.84 164.78,17.84 165.35,18.41 165.35,49.21 | 156.78,9.65 157.35,10.22 157.35,10.41 SENSOR2.5 | 156.78,9.65 156.4,9.65 155.83,10.22 155.83,10.41 SENSOR2.7 155.77,10.22 155.26,9.72 154.69,9.72 154.5,9.91 154.5,10.99 154.94,11.43 154.94,13.34 SENSOR2.1 | U4.4 137.99,54.48 138.3,54.48 139,55.18 U4.9 | U4.9 139.06,55.18 139.26,54.99 139.89,54.99 U4.6 139.95,54.93 140.34,54.93 144.08,51.18 R2-USB.2 144.21,51.18 147.96,51.18 148.4,51.63 D1.2 148.46,51.69 148.72,51.69 149.22,52.2 149.22,52.96 148.97,53.21 148.97,57.72 | U4.1 137.99,55.94 138.3,55.94 139,55.24 U4.9 | 148.97,57.72 148.97,59.44 TP5.TP | J2.B1 163.64,57.4 163.64,57.59 J2.A12 | J2.A12 163.58,57.72 163.58,58.8 164.15,59.37 J2.MP4 164.21,59.44 168.08,59.44 J2.MP2 168.08,59.37 168.08,49.28 J2.MP1 168.08,49.21 165.35,49.21 | 165.35,49.21 164.21,49.21 J2.MP3 164.15,49.21 163.64,49.72 163.64,50.93 J2.A1 163.64,50.99 163.64,51.24 J2.B12 163.58,51.31 162.43,51.31 162.37,51.37 155.64,51.37 R2-USB1.1 155.51,51.31 155.13,51.31 152.65,48.83 C5_USB.2 152.59,48.83 152.59,47.12 C4_USB.2 152.59,47.05 152.59,43.5 139.26,30.16 125.28,30.16 R2_BAT.1 125.22,29.97 125.22,30.16 122.43,32.96 122.43,37.15 | 148.97,57.72 163.51,57.72 J2.A12 | CHANGE_BUTTON.1 47.31,107.76 50.74,107.76 CHANGE_BUTTON.2 50.8,107.76 52.13,106.43 52.13,106.17 C6.2 52.2,106.43 v60.9,106.43 | C10.2 67.25,105.6 67.25,106.3 65.79,107.76 BOOT_BUTTON.2 65.72,107.76 62.29,107.76 BOOT_BUTTON.1 62.23,107.7 61.78,107.25 v61.78,106.55
  Top 0.15: U1.4 37.4,56.2 39.37,56.2 41.21,58.04 U1.9 | 51.56,90.36 49.15,90.36 37.21,78.42 TP4.TP 37.15,78.36 35.81,77.03 35.81,57.98 37.4,56.39 37.4,56.26 U1.4 | 51.56,90.36 53.09,90.36 IC1.3 | 51.56,90.36 v51.56,97.03 | v133.6,39.18 135.13,37.66 C_DELAY.2 | v131.51,39.18 130.75,39.18 130.05,39.88 C3.- | 122.43,37.15 123,37.72 123.25,37.72 MCP73831.2 | 122.27,37.24 122.36,37.15 122.43,37.15 | 122.27,37.24 121.09,38.42 119.89,38.42 D10.2 119.83,38.35 119.83,38.16 118.11,36.45 118.11,36.32 112.71,30.92 103.63,30.92 C7.2 103.57,30.92 99,30.92 | v122.3,37.27 122.27,37.24 | 119.83,52.64 119.83,51.82 C1_BAT2.2 | 119.83,52.64 119.83,52.7 | 119.83,52.7 119.83,53.98 C1_BAT1.2 | 119.83,52.7 123.32,52.7 IC4.2 | v111.32,51.37 100.9,51.37 C10_SUPERCAP.1 | v119.7,52.64 119.83,52.64 | v86.49,58.42 85.34,59.56 85.34,60.33 U3.13 | 3.78,93.44 2.16,95.06 2.16,95.44 J4.G4 2.16,95.5 2.16,97.22 4,99.06 6.86,99.06 16.95,109.16 19.68,109.16 19.88,108.97 19.88,107.82 | 3.78,93.44 4.57,92.65 4.7,92.65 J4.P6 | 3.78,93.44 1.14,90.81 1.14,82.36 J4.G3 | U2.29_8 14.73,55.37 14.73,54.23 U2.29_7 14.67,54.23 13.53,54.23 U2.29_4 | U2.29_1 12.19,54.23 12.19,55.37 U2.29_2 12.19,55.5 12.19,56.64 U2.29_3 | U2.29_4 13.46,54.23 13.46,55.37 U2.29_5 | U2.29_1 12.26,54.23 13.4,54.23 U2.29_4 | U2.29_3 12.26,56.71 13.4,56.71 U2.29_6 13.46,56.71 14.67,56.71 U2.29_9 | U2.29_3 12.26,56.77 12.26,59.69 7.75,64.2 7.75,65.66 U2.28 7.75,65.72 7.75,77.72 15.3,85.28 J4.G1 15.3,85.34 15.3,86.36 14.54,87.12 14.54,90.11 15.37,90.93 J4.G2 15.3,91.06 13.46,92.9 13.46,99.19 D12.2 13.46,99.25 13.46,102.68 18.61,107.82 19.88,107.82
  Top 0.15: C5.2 27.94,106.55 26.99,106.55 25.78,107.76 RESET_BUTTON.2 25.72,107.82 22.29,107.82 RESET_BUTTON.1 22.23,107.82 19.88,107.82 | J1.17 81.79,15.11 81.79,14.73 82.8,13.72 85.15,13.72 86.17,14.73 86.17,15.11 J1.8 86.23,15.18 86.23,24 | EPD_C10.1 75.95,23.94 79.57,23.94 79.76,23.75 EPD_C2.1 79.76,23.81 81.53,25.59 85.53,25.59 85.72,25.4 | EPD_C12.1 82.3,23.43 84.71,23.43 84.96,23.69 EPD_C8.1 85.03,23.75 85.28,24 85.72,24 | 85.72,24 86.23,24 | 86.23,24 87.69,24 EPD_C7.1 | 85.72,24 85.72,25.4 | 99,30.92 97.35,32.58 D3.1 | 90.74,23.88 90.74,12.7 J1.MP1 90.68,12.7 77.28,12.7 J1.MP2 77.22,12.7 70.17,12.7 | 90.74,23.88 91.19,24.32 EPD_C6.1 91.25,24.38 91.5,24.64 93.92,24.64 EPD_C11.1 93.98,24.64 94.36,24.26 96.52,24.26 EPD_C9.1 96.52,24.32 99,26.8 99,30.92 | 85.72,25.4 86.68,25.4 87.19,25.91 88.65,25.91 90.68,23.88 90.74,23.88 | C1_BAT.2 27.5,25.97 31.43,25.97 31.5,25.91 C8.2 31.43,26.04 31.43,27.05 32.13,27.75 32.13,28.83 | 32.13,28.83 32.13,29.02 31.43,29.72 D8.2 31.37,29.78 27.43,29.78 27.18,30.04 D9.2 27.11,30.1 25.59,30.1 7.75,47.94 7.75,48.13 U2.1 7.75,48.2 7.75,48.45 8.38,49.09 v8.38,49.28 | 35.94,48.9 37.34,48.9 37.59,49.15 D11.2 37.66,49.21 v37.66,50.04 | 35.94,48.9 34.16,48.9 C2.2 | 35.24,28.83 35.24,29.21 35.94,29.91 D6.2 35.94,29.97 35.94,48.9 | 35.24,28.83 35.24,27.88 35.94,27.18 35.94,25.84 C2_BAT.2 36.01,25.78 60.58,25.78 63.5,22.86 R1_PWRUSB.1 63.56,22.86 63.56,11.81 63.37,11.62 63.37,7.81 64.55,6.64 | 70.17,12.7 68.83,14.03 EPD_C5.1 68.83,13.97 67.5,13.97 EPD_C1.1 | 64.55,6.64 63.88,5.97 63.88,5.91 SJ1.1 63.94,5.78 63.94,5.59 64.71,4.83 66.1,4.83 66.67,5.4 68.2,5.4 R2.1 68.26,5.46 70.17,7.37 70.17,12.7
  Top 0.15: 64.55,6.64 65.22,7.3 65.22,8.38 R4.2 | v32.64,28.83 32.13,28.83 | v35.12,28.83 35.24,28.83 | v12.19,53.09 12.19,54.1 U2.29_1 | v37.66,53.4 37.66,56.13 U1.4
  Bottom 0.15: v61.78,106.55 61.66,106.43 v60.9,106.43 60.9,106.36 v51.56,97.03 | v133.6,39.18 v131.51,39.18 126.05,39.18 124.14,37.27 v122.3,37.27 122.3,44.01 118.43,47.88 118.43,51.37 | 118.43,51.37 v111.32,51.37 111.25,51.37 104.2,58.42 v86.49,58.42 | v119.7,52.64 118.43,51.37 | v35.12,28.83 v32.64,28.83 | v8.38,49.28 v12.19,53.09 | v37.66,50.04 v37.66,53.4
  other vias: 63.52,90.81
  pour Top: 74.97,9.99 75,10 93.2,10 93.23,9.99 93.25,9.97 93.26,9.94 93.26,0.02 170.12,0.02 170.12,67.14 92.19,67.14 92.17,67.15 92.14,67.17 92.13,67.2 92.13,111.1 70.06,111.1 70.06,109.97 70.05,109.94 70.03,109.92 70,109.91 17.98,109.91 17.95,109.92 17.93,109.94 17.91,109.97 17.91,111.11 0.06,111.11 0.06,65.93 6.25,65.93 6.28,65.92 6.3,65.9 6.31,65.87 6.31,47.79 6.3,47.77 6.28,47.74 6.25,47.73 0.09,47.73 0.09,0.04 74.94,0.04 74.94,9.94 74.95,9.97
  pour Bottom: 74.89,10.21 74.92,10.22 93.23,10.22 93.26,10.21 93.28,10.19 93.29,10.16 93.29,0.12 170.07,0.12 170.07,67.07 92.13,67.07 92.1,67.08 92.08,67.1 92.07,67.13 92.07,111.01 70.16,111.01 70.16,109.92 70.15,109.89 70.13,109.87 70.1,109.86 17.91,109.86 17.88,109.87 17.86,109.89 17.85,109.92 17.85,111.02 0.18,111.02 0.18,66.17 6.28,66.17 6.31,66.15 6.33,66.13 6.34,66.11 6.34,47.76 6.33,47.73 6.31,47.71 6.28,47.7 0.16,47.7 0.16,0.12 74.86,0.12 74.86,10.16 74.87,10.19
GPIO8
  Top 0.15: R1.2 22.35,43.5 22.35,44.51 19.18,47.69 19.18,48.13 U2.10
I2C_PW  (via drill 0.3)
  Top 0.15: R1_PINH.2 154.5,6.6 152.46,6.6 R2-PINH.2 152.46,6.67 152.21,6.92 v152.21,7.3 | v47.12,50.16 44.64,52.64 34.48,52.64 21.72,65.41 21.72,65.66 U2.17 | v62.93,11.18 v48.9,25.21
  Bottom 0.15: v47.12,50.16 47.12,26.99 v48.9,25.21 | v62.93,11.18 63.5,11.18 64.39,10.29 74.74,10.29 74.87,10.41 149.1,10.41 v152.21,7.3
IC2_PW
  Top 0.15: C2.1 34.16,47.5 34.16,25.21 54.86,4.51 68.52,4.51 75.95,11.94 144.65,11.94 152.34,4.25 158.5,4.25 159.26,5.02 C1.1
INT_RTC  (via drill 0.3)
  Top 0.15: v87.38,49.21 89.03,47.56 R1_PINH1.1 | v84.64,52.26 84.64,51.69 84.07,51.12 U3.3 | v12.83,44.13 16.57,47.88 16.57,48.13 U2.8 16.64,48.2 16.64,48.45 18.99,50.8 40.01,50.8 41.08,49.72 47.31,49.72 47.94,50.35 v69.28,50.35 | v10.73,44.13 5.46,38.86 TP15.TP
  Bottom 0.15: v87.38,49.21 87.38,49.53 v84.64,52.26 81.98,52.26 81.03,51.31 70.23,51.31 v69.28,50.35 | v10.73,44.13 v12.83,44.13
IO/BOOT
  Top 0.15: BOOT_BUTTON.3 65.72,109.28 62.29,109.28 BOOT_BUTTON.4 62.23,109.22 61.53,108.52 61.47,108.52 61.34,108.39 61.34,104.78 | 61.34,104.78 62.67,104.78 63.31,104.14 R_BOOT.1 | 61.34,104.78 52.2,104.78 C6.1 52.13,104.84 48.64,104.84 46.04,107.44 42.8,107.44 24.26,88.9 24.26,65.72 U2.15
IO/CHANGE  (via drill 0.3)
  Top 0.15: v64.64,104.33 67.25,104.33 C10.1 | v59.75,109.22 50.8,109.22 CHANGE_BUTTON.3 50.74,109.28 47.31,109.28 CHANGE_BUTTON.4 47.24,109.28 46.16,108.2 43.81,108.2 R_CHANGE.1 43.75,108.14 43.05,108.14 14.1,79.18 14.1,65.72 U2.23
  Bottom 0.15: v59.75,109.22 v64.64,104.33
MISO  (via drill 0.3)
  Top 0.15: v9.46,99.19 11.87,99.19 D12.1 | v3.87,94.23 4.38,94.23 4.89,93.73 J4.P7 | v8.95,78.3 8.95,65.72 U2.27 9.02,65.66 9.02,65.41 20.32,54.1 v32.38,54.1 | 57.37,36.99 46.16,48.2 v38.86,48.2 | 57.37,36.99 67.06,27.3 67.06,24 67.82,23.24 67.82,23.05 R8.1 | v37.02,58.1 37.02,58.36 37.34,58.67 U1.2 | v89.92,66.8 90.55,66.8 93.6,63.75 148.97,63.75 TP6.TP | 57.37,36.99 v69.34,48.96
  Bottom 0.15: v9.46,99.19 9.27,99.19 4.32,94.23 v3.87,94.23 3.87,92.2 3.37,91.69 3.37,89.6 8.95,84.01 v8.95,78.3 | v38.86,48.2 37.02,50.04 37.02,54.1 | v37.02,58.1 37.02,54.1 | v89.92,66.8 85.09,66.8 68.83,50.55 68.83,49.47 v69.34,48.96 | 37.02,54.1 v32.38,54.1
MOSI  (via drill 0.3)
  Top 0.15: v83.19,16.64 83.19,15.18 J1.14 | v94.55,55.63 95.19,56.26 R7.1 | v39.81,49.85 37.66,47.69 D11.1 | v44.39,54.42 44.39,55.44 45.09,56.13 U1.5 45.15,56.2 48.77,56.2 54.23,61.66 TP7.TP 54.29,61.66 64.58,51.37 66.93,51.37 67.44,50.86 v71.75,50.86 | 18.16,51.24 15.37,48.45 15.37,48.2 U2.7 | v38.35,51.24 18.16,51.24 | v6.1,88.96 5.78,89.28 4.95,89.28 J4.P3 | v18.16,51.31 18.16,51.24
  Bottom 0.15: v83.19,16.64 83.19,31.11 87.34,35.27 | 87.34,35.27 94.55,42.48 v94.55,55.63 | v44.39,54.42 v39.81,49.85 39.75,49.85 v38.35,51.24 | v6.1,88.96 6.1,87.76 9.84,84.01 9.84,59.63 v18.16,51.31 | v71.75,50.86 87.34,35.27
N$1
  Top 0.15: J1.22 79.18,15.18 79.18,20.07 75.88,23.37 75.37,23.37 75.18,23.56 75.18,24.57 75.88,25.27 EPD_C10.2
N$2
  Top 0.15: 124.08,52.32 123.57,51.82 123.38,51.82 IC4.3 123.32,51.75 120.9,51.75 120.27,51.12 119.32,51.12 119.19,51.24 119.13,51.24 | 124.08,52.32 124.08,53.09 123.51,53.66 IC4.1 | 124.08,52.32 128.97,52.32 134.56,46.74 135.25,46.74 Q1.2 | 119.13,51.24 116.14,48.26 97.6,48.26 85.66,36.32 85.22,36.32 D2.1 | 119.13,51.24 119.13,53.4 118.56,53.98 C1_BAT1.1
N$3
  Top 0.15: R2_BAT.2 125.22,31.3 125.22,36.26 125.03,36.45 125.03,37.85 125.86,38.67 MCP73831.5
N$4
  Top 0.15: J1.20 80.26,15.18 80.26,23.05 81.53,24.32 81.53,25.15 81.66,25.27 84.71,25.27 84.96,25.02 EPD_C8.2
N$5
  Top 0.15: R2-USB.1 144.21,49.85 148.78,49.85 150.11,51.18 150.11,53.02 153.1,56.01 163.58,56.01 J2.B5
N$6
  Top 0.15: C4.1 121.16,47.88 118.49,47.88 103.12,32.51 100.9,32.51 100.84,32.58 D3.2 100.78,32.64 96.39,37.02 86.81,37.02 86.68,36.89 86.68,36.64 85.66,35.62 82.8,35.62 71.44,24.26 70.29,24.26 69.47,23.43 69.47,21.84 68.52,20.89 68.52,19.75 D4.1
N$7  (via drill 0.3)
  Top 0.15: v6.54,98.36 4.45,98.36 R1_BAT.1 | v91.95,62.55 v87.25,67.25 | v124.27,38.8 123.38,38.8 123.32,38.73 MCP73831.1
  Bottom 0.15: v6.54,98.36 8,98.36 9.27,99.63 33.85,99.63 66.23,67.25 v87.25,67.25 | v91.95,62.55 110.87,62.55 124.27,49.15 v124.27,38.8
N$8  (via drill 0.3)
  Top 0.15: v119.51,47.43 117.47,45.4 117.47,38.35 CHG_LED.C | v76.58,77.03 v91.5,62.1 | v5.08,100.27 4.45,99.63 R1_BAT.2
  Bottom 0.15: v119.51,47.43 119.51,51.82 120.14,52.45 120.14,52.83 110.87,62.1 v91.5,62.1 | v76.58,77.03 64.01,77.03 54.36,86.68 54.36,91.38 53.85,91.89 42.48,91.89 34.1,100.27 v5.08,100.27
N$9
  Top 0.15: J1.19 80.77,15.11 80.77,14.73 82.11,13.4 88.84,13.4 90.11,14.67 90.11,22.99 87.76,25.34 EPD_C7.2
N$10
  Top 0.15: R2-USB1.2 155.57,52.7 162.69,52.7 163,53.02 163.58,53.02 J2.A5
N$11  (via drill 0.3)
  Top 0.15: v85.34,22.1 81.22,17.97 81.22,15.18 J1.18 | v89.09,26.1 90.81,26.1 91.19,25.72 EPD_C6.2
  Bottom 0.15: v85.34,22.1 87.82,24.57 87.82,24.83 v89.09,26.1
N$12  (via drill 0.3)
  Top 0.15: v78.23,20.38 78.23,15.18 J1.24 | v81.41,23.56 81.41,23.75 82.23,24.57 EPD_C12.2
  Bottom 0.15: v81.41,23.56 v78.23,20.38
N$13
  Top 0.15: D7.1 84.71,64.77 86.42,63.06 86.49,63.06 86.81,62.74 86.81,61.78 87.31,61.28 87.31,59.31 94.74,51.88 94.87,51.88 R_CAPACITOR.2
N$14  (via drill 0.3)
  Top 0.15: v86.68,20.83 87.69,19.81 87.69,15.18 J1.5 | v83.63,26.04 80.83,26.04 EPD_C2.2
  Bottom 0.15: v86.68,20.83 85.98,20.83 83.63,23.18 v83.63,26.04
N$15  (via drill 0.3)
  Top 0.15: v87.76,14.35 88.2,14.8 88.2,15.11 J1.4 | v69.53,14.67 68.01,14.67 67.5,15.18 EPD_C1.2
  Bottom 0.15: v87.76,14.35 84.64,14.35 84.33,14.67 v69.53,14.67
N$17
  Top 0.15: 155.83,11.24 156.08,11.24 156.59,10.73 SENSOR2.6 | 155.83,11.24 155.51,11.24 155,10.73 155,10.48 SENSOR2.8 | 155.83,11.24 155.83,13.34 SENSOR2.2
N$21
  Top 0.15: C_DELAY.1 135.19,36.39 135.19,36.58 138.62,40.01 138.62,47.12 130.68,55.05 123.64,55.05 118.75,59.94 96.14,59.94 79.69,76.39 79.69,96.46 78.99,97.16 60.77,97.16 55.94,92.33 IC1.5
PREVGH  (via drill 0.3)
  Top 0.15: v90.3,23.43 90.42,23.3 90.42,14.54 88.96,13.08 81.47,13.08 79.76,14.8 79.76,15.11 J1.21 | v92.27,25.4 96.46,25.4 96.52,25.46 EPD_C9.2 96.58,25.53 97.35,26.29 97.35,29.08 D5.1
  Bottom 0.15: v92.27,25.4 v90.3,23.43
PREVGL
  Top 0.15: 74.55,19.68 72.01,19.68 D4.2 | 74.55,19.68 75.75,19.68 75.95,19.49 75.95,16.57 77.98,14.54 78.49,14.54 78.68,14.73 78.68,15.11 J1.23 | 74.55,19.68 74.55,25.4 83.95,34.8 86.17,34.8 86.3,34.67 86.3,30.16 87.44,29.02 89.28,29.02 92.27,26.04 93.92,26.04 EPD_C11.2
RESE  (via drill 0.3)
  Top 0.15: v88.33,15.94 88.71,15.56 88.71,15.18 J1.3 | v65.85,12.38 65.85,11.75 65.28,11.18 Q3.2 | v110.05,49.47 113.92,53.34 R3.1
  Bottom 0.15: 85.03,15.94 84.96,15.94 84.14,15.11 68.58,15.11 v65.85,12.38 | 85.03,15.94 v88.33,15.94 | v110.05,49.47 110.05,46.42 88.14,24.51 88.14,21.65 84.9,18.41 84.9,16.51 85.03,16.38 85.03,15.94
RESE'
  Top 0.15: 66.29,6.67 68.2,6.67 R2.2 | 66.29,6.67 65.47,5.84 SJ1.2 | 66.29,6.67 66.29,19.11 69.03,21.84 69.03,24.89 89.6,45.47 89.6,47.94 90.68,49.02 110.74,49.02 115.06,53.34 115.25,53.34 R3.2
RESET  (via drill 0.3)
  Top 0.15: RESET_BUTTON.4 22.29,109.35 25.72,109.35 RESET_BUTTON.3 25.78,109.28 26.48,109.28 27.88,107.89 C5.1 27.94,107.82 28.64,107.12 28.64,106.11 | 28.64,106.11 28.51,105.98 22.54,105.98 21.27,107.25 R_RESET.1 19.18,107.19 14.29,102.3 v14.29,99.19 | v52.01,92.33 IC1.1 | 28.64,106.11 v38.23,106.11 | v10.29,61.02 10.29,48.2 U2.3
  Bottom 0.15: v38.23,106.11 v52.01,92.33 | v10.29,61.02 10.29,95.19 v14.29,99.19
RTC_RST  (via drill 0.3)
  Top 0.15: v66.74,50.93 64.58,50.93 62.55,52.96 35.43,52.96 22.99,65.41 22.99,65.66 U2.16 | v68.07,52.26 80.07,52.26 80.58,52.77 84.77,52.77 85.28,52.26 85.28,51.12 U3.4
  Bottom 0.15: v68.07,52.26 v66.74,50.93
RX  (via drill 0.3)
  Top 0.15: v13.65,66.8 12.83,65.98 12.83,65.72 U2.24 | v55.37,77.41 73.85,95.89 78.42,95.89 TP2.TP
  Bottom 0.15: v13.65,66.8 16.83,66.8 27.43,77.41 v55.37,77.41
SCK  (via drill 0.3)
  Top 0.15: 83.76,16.64 83.76,15.18 J1.13 | v85.34,18.22 83.76,16.64 | v101.16,18.22 119.83,36.89 D10.1 | v8.64,96.33 8.64,98.42 R6.1 | v3.81,91.5 4.89,91.5 J4.P5 | v43.31,57.4 45.09,57.4 U1.6 45.15,57.4 45.91,56.64 v47.12,56.64 | 17.84,52.2 v38.1,52.2 | 17.84,52.2 14.1,48.45 14.1,48.2 U2.6 14.03,48.13 14.03,47.88 13.4,47.24 v13.4,47.05 | v13.4,39.05 5.46,31.11 TP8.TP | v9.4,63.18 17.84,54.74 17.84,52.2 | v81.66,17.08 83.38,17.08 83.76,16.7 83.76,16.64
  Bottom 0.15: v101.16,18.22 v85.34,18.22 | v8.64,96.33 v3.81,91.5 3.81,89.6 9.4,84.01 v9.4,63.18 | v38.1,52.2 v43.31,57.4 | v13.4,47.05 v13.4,39.05 | v81.66,17.08 72.07,17.08 71.75,16.76 65.66,16.76 63.25,19.18 63.25,24.89 51.12,37.02 50.35,37.02 47.56,39.81 47.56,56.2 v47.12,56.64
SCL  (via drill 0.3)
  Top 0.15: v18.73,66.8 17.91,65.98 17.91,65.72 U2.20 | 64.93,64.23 68.77,60.39 81.47,60.39 U3.16 | 64.93,64.23 v63.18,65.98 | 156.88,14.13 157.35,13.65 157.35,13.4 SENSOR2.4 | 156.88,14.13 156.53,14.48 154.62,14.48 151.76,11.62 151.76,6.16 152.4,5.52 152.4,5.33 R2-PINH.1 | 140.46,55.44 139.95,55.44 U4.7 | v144.02,51.88 140.46,55.44 | 163.99,21.24 164.4,20.83 J3.4 | 163.99,21.24 v163.77,21.46 | 163.99,21.24 156.88,14.13 | 64.93,64.23 65.6,64.9 82.36,64.9 85.6,61.66 85.66,61.66 86.04,61.28 86.04,59.31 86.36,58.99 v87,58.99 | v111.95,60.39 136.27,60.39 140.53,56.13 140.53,55.44 140.46,55.44
  Bottom 0.15: v18.73,66.8 19.37,66.8 20.19,65.98 v63.18,65.98 | v144.02,51.88 144.02,41.21 v163.77,21.46 | v87,58.99 110.55,58.99 v111.95,60.39
SDA  (via drill 0.3)
  Top 0.15: v20,66.8 19.18,65.98 19.18,65.72 U2.19 | v65.79,64.45 79.06,64.45 82.74,60.77 82.74,60.39 U3.15 82.8,60.77 83.69,61.66 84.39,61.66 84.77,61.28 84.77,59.31 85.22,58.86 v85.41,58.86 | R1_PINH.1 154.56,5.27 154.56,5.46 155.19,6.1 155.19,8.76 154.18,9.78 154.18,13.59 154.75,14.16 156.08,14.16 156.59,13.65 SENSOR2.3 156.66,13.34 156.66,13.08 157.1,12.64 157.67,12.64 163.07,18.03 163.07,19.62 163.39,19.94 v163.39,20 164.21,20 164.4,19.81 J3.3 | U4.8 139.89,56.01 139.89,56.13 v139.57,56.45 v132.91,56.45
  Bottom 0.15: v20,66.8 63.63,66.8 65.79,64.64 v65.79,64.45 | v139.57,56.45 139.57,43.81 v163.39,20 | v85.41,58.86 86.23,58.86 90.36,62.99 126.36,62.99 v132.91,56.45
SRC  (via drill 0.3)
  Top 0.15: v65.85,17.21 64.64,16 64.64,13.27 Q3.3 | v82.3,27.75 82.3,29.72 84.3,31.72 | 84.3,31.72 84.45,31.88 L1.1 | v102.93,32.96 119.13,49.15 121.16,49.15 C4.2 | v101.79,30.04 100.9,29.15 D5.2 | 84.3,31.72 89.34,26.67 v91,26.67
  Bottom 0.15: v65.85,17.21 71.75,17.21 v82.3,27.75 | v102.93,32.96 102.93,31.18 102.08,30.32 | v101.79,30.04 102.08,30.32 | v91,26.67 99.89,26.67 102.62,29.4 102.62,29.78 102.08,30.32
SS_SD  (via drill 0.3)
  Top 0.15: v36.64,31.94 36.64,29.34 36.01,28.7 36.01,28.45 D6.1 | v12.38,47.05 11.56,47.88 11.56,48.13 U2.4 | v53.91,91.19 56.45,91.19 56.64,91.38 57.91,91.38 R10.1 | v3.37,92.33 3.37,89.47 4.64,88.2 5.33,88.2 J4.P2
  Bottom 0.15: v36.64,31.94 21.08,47.5 12.83,47.5 | v12.38,47.05 12.83,47.5 | v53.91,91.19 42.74,91.19 33.97,99.95 7.49,99.95 3.37,95.82 v3.37,92.33 3.37,92.27 3.05,91.95 3.05,89.47 6.54,85.98 6.54,62.48 12.83,56.2 12.83,47.5
TX  (via drill 0.3)
  Top 0.15: v39.62,105.35 11.56,77.28 11.56,65.72 U2.25 | v84.14,96.58 84.71,96.58 85.34,95.95 TP1.TP
  Bottom 0.15: v39.62,105.35 42.61,105.35 51.37,96.58 v84.14,96.58
USB_D+  (via drill 0.3)
  Top 0.15: v93.28,63.44 133.67,63.44 144.53,52.58 148.4,52.58 D1.1 | v91.69,63.44 77.66,77.47 59.63,77.47 v45.91,63.75 | v25.78,48.2 24.26,48.2 U2.14
  Bottom 0.15: v91.69,63.44 v93.28,63.44 | v45.91,63.75 41.34,63.75 v25.78,48.2
USB_D-  (via drill 0.3)
  Top 0.15: v133.03,53.34 135.83,50.55 144.65,50.55 144.78,50.67 148.4,50.67 D1.3 | v114.55,59.5 93.47,59.5 87.44,65.53 v64.26,65.53 | v26.1,49.15 23.69,49.15 22.99,48.45 22.99,48.2 U2.13
  Bottom 0.15: v133.03,53.34 120.71,53.34 v114.55,59.5 | v64.26,65.53 42.48,65.53 v26.1,49.15
VBAT  (via drill 0.3)
  Top 0.3: U4.2 137.99,55.44 137.99,54.99 U4.3 137.86,54.93 137.54,54.93 137.29,54.67 v137.29,53.78 | v135.32,49.78 Q1.3 | v124.4,38.16 124.4,37.59 123.64,36.83 123.32,36.83 MCP73831.3 | v37.15,25.34 36.39,24.57 36.01,24.57 C2_BAT.1 | 68.26,86.74 v46.61,65.09 | 68.26,86.74 68.26,88.52 TP3.TP | v71.18,86.68 68.39,86.68 68.26,86.74
  Bottom 0.3: v135.32,49.78 135.32,51.82 135.67,52.16 | v137.29,53.78 135.67,52.16 | v124.4,38.16 134.37,48.13 134.37,52.39 134.62,52.64 | 134.62,52.64 135.19,52.64 135.67,52.16 | v37.15,25.34 37.15,25.46 46.61,34.92 v46.61,65.09 | v71.18,86.68 91.12,66.74 123.38,66.74 134.56,55.56 134.56,52.77 134.62,52.64
VBUS  (via drill 0.3)
  Top 0.3: v151.89,51.12 151.38,51.63 150.94,51.63 D1.5 | v151.32,49.97 151.32,48.96 C5_USB.1 151.26,48.83 151.32,48.77 151.32,47.12 C4_USB.1 151.32,46.93 151.32,45.09 150.56,44.32 PFMF.050.1.2 150.37,44.26 148.91,44.26 140.21,35.56 128.78,35.56 126.71,37.62 | 126.56,39.31 119.38,39.31 119.06,38.99 119.06,38.67 117.47,37.08 117.47,36.83 CHG_LED.A 117.35,36.77 112.46,31.88 100.14,31.88 95.76,36.26 87.31,36.26 D2.2 87.19,36.2 v86.23,35.24 | 126.56,39.31 126.81,39.05 126.81,37.72 126.71,37.62 | 126.71,37.62 125.92,36.83 MCP73831.4 | Q1.1 133.35,46.67 133.35,46.16 126.62,39.43 126.56,39.31 | v30.67,24.7 27.5,24.7 C1_BAT.1 | v62.8,24.7 63.12,24.7 63.56,24.26 R1_PWRUSB.2 63.75,24.26 v66.61,27.11 | v44.9,60.96 44.9,73.85 TP14.TP
  Bottom 0.3: v151.89,51.12 151.89,50.55 v151.32,49.97 | v62.8,24.7 36.64,24.7 | 36.64,24.7 v30.67,24.7 | v44.9,60.96 44.9,33.85 36.64,25.59 36.64,24.7 | v86.23,35.24 74.74,35.24 v66.61,27.11
VRTC  (via drill 0.3)
  Top 0.15: C10_SUPERCAP.2 100.84,53.53 100.71,53.53 97.73,50.55 94.93,50.55 R_CAPACITOR.1 94.81,50.55 93.03,50.55 83.82,59.75 U3.14 84.01,60.33 84.01,60.01 76.71,52.7 v65.79,52.7 | v32.64,25.72 31.56,24.64 C8.1 | v50.55,37.47 v44.39,37.47
  Bottom 0.15: v44.39,37.47 v32.64,25.72 | v65.79,52.7 v50.55,37.47
VUSB  (via drill 0.3)
  Top 0.3: J2.A9 163.64,56.83 163.64,56.58 J2.B4 163.77,56.52 164.27,56.52 164.78,56.01 164.78,52.58 164.27,52.07 163.77,52.07 J2.B9 163.64,52.01 163.64,51.75 J2.A4 163.51,51.75 v162.62,51.75 | v147.13,45.02 146.75,45.02 146.05,44.32 PFMF.050.1.1
  Bottom 0.3: v162.62,51.75 153.86,51.75 v147.13,45.02